# Altium PCB MB1137.PcbDoc (part 2 of 4)
Units mm, origin at the board's own origin, x right, y up, seen from the top; angles counter-clockwise.
Board outline 70.13 x 133.47 mm, 6 copper layers (Top Layer, GND, Signal, PWR, GND (Mid2), Bottom Layer), stack 1.893 mm thick; 293 components, 281 nets, 1134 pads, 921 vias.
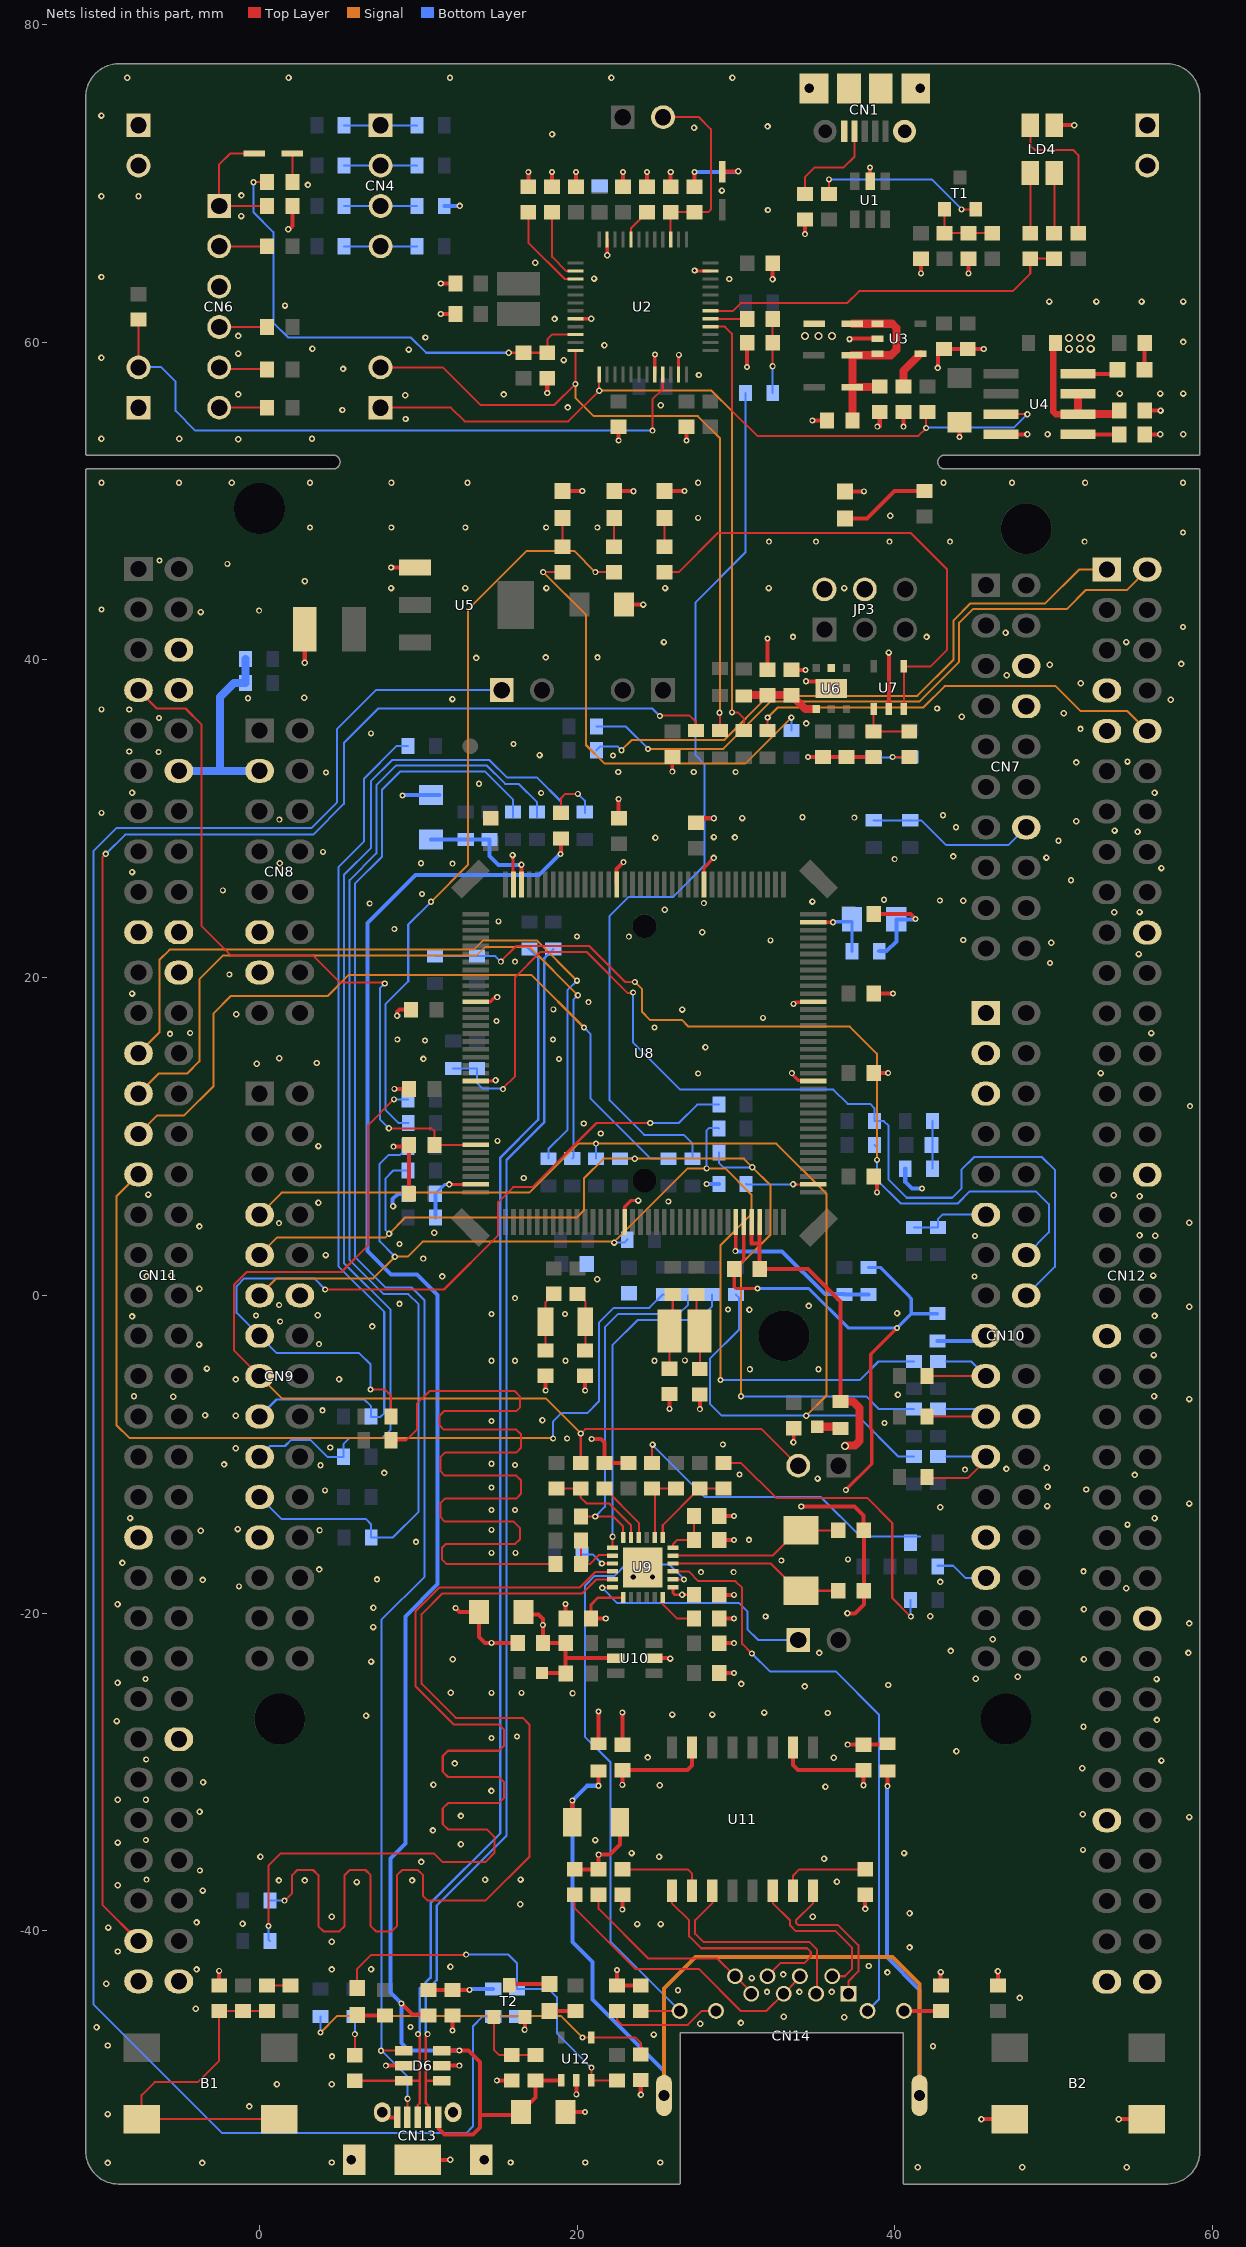
[diagram p6: the nets of this part, all layers, seen from the top]

## Via types
v1: diameter 0.406, hole 0.203, Top Layer to Bottom Layer, tented both sides, 464 vias
v2: diameter 0.381, hole 0.203, Top Layer to Bottom Layer, tented both sides, 415 vias
v3: diameter 0.508, hole 0.305, Top Layer to Bottom Layer, tented both sides, 39 vias
v4: diameter 0.66, hole 0.33, Top Layer to Bottom Layer, tented both sides, 2 vias
v5: diameter 0.381, hole 0.203, Top Layer to Bottom Layer, 1 vias

## Nets (pads, with @x,y where several pads share a name; then routed paths per layer and width w, separated by ;. In a path a pad name is that pad's centre, name@x,y a point inside that pad or via, vN(x,y) a via of type N, cw(c..) or ccw(c..) an arc to the next point about the centre after c; other vN are vias at no path point) (continued)
AGND: C34.2 CN10.3 CN12.32 SB162.2 SB166.1 U8.31 | length 34.6
  Top Layer w0.203: U8.31@30.482,4.615 30.482,2.249 C34.2@29.883,1.651 29.883,0.537 29.986,0.434 31.347,0.434 v2(31.35,0.432) ; v2(36.906,-12.243) 38.537,-10.612 38.537,-8.451 38.473,-8.387 38.473,-3.706 v2(40.132,-2.047)
  Bottom Layer w0.203: v2(31.35,0.432) 34.584,0.432 37.063,-2.047 v2(40.132,-2.047) 41.03,-1.149 ; SB166.1@38.329,1.764 39.079,1.764 40.823,0.02 40.823,0.007 41.03,-0.2 41.03,-1.149 ; SB162.2@42.672,-1.149 41.03,-1.149
AIN_1: R1.2 R24.2 R25.2 U2.10 | length 31
  Top Layer w0.127: v1(-0.381,70.079) R1.2@0.47,70.079 ; v1(15.687,59.339) R25.2@16.612,59.339 R24.2@18.11,59.339 18.11,60.195 18.395,60.48 U2.10@19.88,60.48
  Bottom Layer w0.127: v1(-0.381,70.079) -0.381,68.174 0.864,66.929 0.864,61.239 1.803,60.3 9.525,60.3 10.485,59.339 v1(15.687,59.339)
AVDD: C34.1 CN7.6 CN10.1 CN12.7 SB12.2 U8.32 U8.33 | length 21.6
  Top Layer w0.254: U8.32@30.982,4.615 30.982,3.261 31.482,3.261 ; U8.33@31.482,4.615 31.482,3.261 ; C34.1@31.483,1.575 31.482,1.577 31.482,3.261 ; C34.1@31.483,1.651 34.537,1.651 36.576,-0.388 SB12.2@36.576,-6.675
  Top Layer w0.508: SB12.2@36.576,-6.675 37.358,-6.675 37.77,-7.087 37.77,-9.172 37.493,-9.449 36.881,-9.449 v3(36.852,-9.478)
BOOT0: CN11.7 R36.1 U8.138 | length 46.5
  Top Layer w0.127: CN11.7@-7.62,38.1 -6.464,36.944 -4.661,36.944 -3.658,35.941 -3.658,23.272 -1.773,21.388 3.377,21.388 5.08,19.685 7.874,19.685 v1(7.874,19.634) ; v1(8.142,10.516) 10.82,10.516 11.011,10.325 R36.1@11.011,9.474 ; R36.1@11.023,9.461 U8.138@13.578,9.461
  Bottom Layer w0.127: v1@7.874,19.685 v1(7.874,19.634) 7.569,19.329 7.569,11.089 v1(8.142,10.516)
E5V: CN11.6 D3.1 JP3.2
  other v3: 34.341,60.401 35.192,60.401 36.043,60.401
EGND: C51.1 CN14.13 CN14.14 SB16.1 SB17.1 | length 77.9
  Top Layer w0.254: C51.1@19.684,-33.172 19.684,-31.802 v2(19.685,-31.801) ; v2(21.336,-30.867) SB16.1@21.336,-29.94 ; v2(39.522,-30.893) SB17.1@39.522,-29.94
  Signal w0.254: CN14.14@25.463,-50.359 25.463,-43.625 27.429,-41.659 39.855,-41.659 41.543,-43.346 CN14.13@41.543,-50.359
  Bottom Layer w0.254: v2(21.336,-30.867) 20.618,-30.867 v2(19.685,-31.801) 19.685,-40.691 20.955,-41.961 20.955,-44.326 25.463,-48.833 CN14.14@25.463,-50.359 ; v2(39.522,-30.893) 39.487,-30.928 39.487,-41.658 41.543,-43.713 CN14.13@41.543,-50.359
GND: B2.1 B2.4 C1.1 C2.1 C3.1 C4.1 C5.2 C6.2 C7.2 C8.1 C9.2 C10.1 C11.1 C12.1 C13.1 C14.1 C15.1 C16.2 C17.2 C18.2 C19.1 C20.2 C21.2 C22.1 C23.2 C24.2 C25.2 C26.2 C27.2 C28.2 C29.2 C30.2 C31.2 C32.2 C33.2 C35.2 C36.2 C37.2 C38.2 C39.2 C40.1 C41.2 C42.1 C43.2 C44.1 C45.2 C46.2 C47.1 C48.1 C49.1 C50.1 C53.1 C54.2 C55.2 C56.2 C57.2 C58.2 CN1.5 CN1.6 CN1.7 CN1.8 CN1.9 CN1.10 CN2.1 CN2.2 CN3.1 CN3.2 CN6.3 CN7.8 CN8.11 CN8.13 CN9.12 CN9.23 CN10.5 CN10.17 CN10.22 CN10.27 CN11.8 CN11.19 CN11.20 CN11.22 CN11.49 CN11.60 CN11.71 CN11.72 CN12.9 CN12.20 CN12.39 CN12.54 CN12.63 CN12.71 CN12.72 CN13.5 CN13.6 CN13.7 CN13.8 CN13.9 CN13.10 D6.2 D6.5 JP2.1 LD1.2 LD2.2 LD3.2 LD4.1 LD6.2 R2.2 R3.1 R4.1 R6.1 R7.2 R11.2 R16.1 R24.1 R28.1 R33.2 R36.2 R41.2 R49.2 R58.2 R63.2 R65.2 R66.2 R67.2 R69.1 R72.1 SB16.2 SB17.2 SB106.2 SB107.1 SB129.2 SB152.2 SB153.2 SB155.2 SB162.1 T2.2 U1.2 U2.8 U2.20 U2.23 U2.35 U2.47 U3.2 U4.4 U5.1 U6.0 U6.2 U7.2 U8.16 U8.51 U8.61 U8.83 U8.94 U8.107 U8.120 U8.130 U9.25 U10.2 U12.2 | length 158.5
  Top Layer w0.203: U8.130@13.607,13.49 v1@14.852,13.49 ; U8.120@13.607,18.49 14.53,18.49 14.81,18.771 v2(14.961,18.771) ; v1(15.926,27.719) 15.951,27.694 15.951,25.896 U8.107@15.982,25.865 ; U2.8@19.88,61.48 v1(20.883,61.479) v1(20.883,61.479) ; v1(21.88,65.475) U2.47@21.88,66.48 ; U8.16@22.982,4.615 22.982,5.583 23.368,5.969 v1(23.836,5.969) ; U2.20@24.88,57.98 v2@24.88,59.221 ; v2(25.984,32.969) C21.2@25.984,33.896 C21.2@26.162,33.719 ; U2.23@26.38,57.98 v2@26.38,59.197 ; v1(27.381,64.516) 27.417,64.48 U2.35@28.38,64.48 ; U8.83@27.982,25.865 27.982,26.928 v1(28.594,27.54) ; v2(33.503,13.99) 33.503,13.938 33.905,13.535 34.811,13.535 U8.51@34.857,13.49 ; v1(33.604,-9.246) 33.63,-9.22 C39.2@33.63,-8.354 ; v2(33.618,18.355) 33.716,18.453 U8.61@34.82,18.453
  Top Layer w0.254: R58.2@-2.54,-43.447 v2(-2.54,-42.52) ; v1@1.854,67.107 2.07,67.323 R2.2@2.07,68.58 ; v1(2.844,39.827) C17.2@2.844,41.935 ; CN13.6@7.732,-51.415 8.057,-51.74 CN13.5@8.657,-51.74 ; v2@7.976,-48.489 D6.2@9.062,-48.489 ; v1@8.23,45.822 v1(8.28,45.822) U5.1@9.779,45.822 ; v2(8.426,9.36) R36.2@9.354,9.36 ; v2(8.484,13.005) C30.2@9.411,13.005 ; v1(8.657,17.602) 8.657,17.826 8.814,17.983 C28.2@9.538,17.983 ; C33.2@9.411,6.401 R36.2@9.411,9.474 ; CN13.8@9.957,-54.415 v1(11.997,-54.415) ; v2(11.405,61.773) C6.2@12.332,61.773 ; v2(11.405,63.703) C5.2@12.332,63.703 ; D6.5@11.462,-48.489 v2@12.548,-48.489 ; v2(12.141,-46.279) R63.2@12.141,-45.326 ; v2(12.344,-19.685) 12.598,-19.939 C46.2@13.818,-19.939 13.818,-21.488 14.199,-21.869 v2(14.605,-21.869) C48.1@16.243,-21.869 ; v2(14.935,-49.417) 14.937,-49.416 R69.1@15.875,-49.416 ; v2(16.688,-46.228) 16.703,-46.213 T2.2@16.703,-45.425 ; R3.1@16.916,69.786 v2(16.916,70.714) ; v2(18.009,-5.994) C35.2@18.009,-5.067 ; v2(18.11,56.812) R24.1@18.11,57.739 ; R4.1@18.415,69.786 v2(18.415,70.714) ; LD3.2@19.12,50.634 v2(20.314,50.633) ; C54.2@19.253,-51.41 v2(20.482,-51.41) ; C47.1@19.266,-20.345 v2(19.266,-19.418) ; C1.1@19.914,69.786 v2(19.914,70.714) ; v2(19.939,-50.292) U12.2@19.939,-49.407 ; v2(20.498,-5.994) C36.2@20.498,-5.067 ; v2(20.904,-9.042) 21.488,-9.042 21.717,-9.271 R41.2@21.717,-10.554 C40.1@23.216,-10.554 ; SB16.2@21.336,-28.226 v2(21.336,-26.194) ; LD2.2@22.346,50.622 v2@23.539,50.622 ; U8.94@22.482,25.865 22.482,26.84 v2(22.911,27.269) ; v2(22.504,-42.469) R65.2@22.504,-43.447 R66.2@23.995,-43.447 ; C25.2@22.606,30.099 v2(22.606,31.242) ; v2(22.606,53.823) C12.1@22.606,54.674 ; C49.1@22.835,-28.283 v2(22.835,-26.251) ; C2.1@22.885,69.786 v2(22.885,70.714) ; C18.2@22.936,43.485 v1(24.155,43.485) ; R72.1@23.995,-49.39 23.995,-50.309 v1(24.003,-50.317) ; R6.1@24.384,69.786 v2(24.384,70.714) ; U10.2@24.83,-22.835 25.859,-22.835 25.857,-22.836 v1(25.857,-22.86) ; LD1.2@25.552,50.634 v2@26.746,50.634 ; v2(25.806,-7.137) C37.2@25.806,-6.21 ; R7.2@25.883,69.786 v2(25.883,70.714) ; v2(26.873,53.823) C13.1@26.873,54.674 ; C26.2@27.483,30.035 v2(28.594,30.035) ; v2(27.711,-7.163) C38.2@27.711,-6.236 ; R49.2@28.943,-20.345 v2(29.87,-20.345) ; C44.1@28.943,-18.847 v2(29.87,-18.847) ; C42.1@28.943,-15.392 v2(29.87,-15.392) ; C41.2@28.943,-13.894 v2(29.87,-13.894) ; v2(30.683,58.445) 30.696,58.458 C7.2@30.696,59.969 ; C19.1@31.979,39.383 v2(31.979,41.353) ; v1(32.296,63.97) C3.1@32.296,64.973 ; C20.2@33.477,39.383 v2@34.404,39.383 ; v1(34.105,-13.29) 37.453,-13.29 38.024,-13.861 38.024,-14.77 C43.2@38.036,-14.783 ; v2(34.341,66.802) R11.2@34.341,67.729 ; v2(34.404,38.659) U6.0@35.331,38.659 ; v2(34.531,33.896) C22.1@35.458,33.896 R33.2@38.659,33.896 ; v2(34.798,55.067) C10.1@35.725,55.067 ; LD6.2@36.856,50.617 v2(38.05,50.616) ; v2(37.021,-28.283) C50.1@38.024,-28.283 SB17.2@39.465,-28.283 ; v1@37.073,-20.015 37.468,-20.015 38.036,-19.446 C45.2@38.036,-18.593 C43.2@38.036,-14.783 ; v1@37.135,60.223 U3.2@38.909,60.223 ; C43.2@38.024,-14.795 C43.2@38.036,-14.783 ; U1.2@38.43,70.136 v2(38.43,70.993) ; C31.2@38.671,13.995 v2(39.573,13.995) ; C29.2@38.671,18.999 v2(39.878,18.999) ; C27.2@38.671,24.003 40.989,24.003 v2(41.294,23.698) ; C32.2@38.697,7.518 C32.2@38.671,7.493 38.862,7.302 v2(38.862,6.49) ; v2(38.887,54.686) 39.04,54.686 C14.1@39.04,55.613 ; U7.2@39.611,36.902 v1(39.611,40.462) ; v2(40.538,54.686) C15.1@40.538,55.613 ; v2(41.631,64.338) C4.1@41.631,65.265 ; v1(42.697,58.382) C8.1@42.697,59.385 ; R67.2@42.875,-43.447 v1(42.875,-42.596) ; C8.1@43.078,59.576 C9.2@44.577,59.576 v1(45.58,59.576) ; v2(44.069,54.038) C16.2@44.069,54.966 ; v2(44.62,64.338) R16.1@44.62,65.265 ; v1(45.437,-51.856) B2.1@47.212,-51.856 ; C53.1@46.482,-43.447 v1(46.482,-42.545) ; U4.4@46.673,54.204 v1(48.336,54.204) ; LD4.1@50.026,73.661 v1(51.281,73.661) ; v1(54.087,-51.856) B2.4@55.862,-51.856 ; R28.1@55.715,54.204 v1(56.693,54.204) ; C11.1@55.715,55.702 v1(56.718,55.702)
  Bottom Layer w0.254: v1(8.407,5.613) 8.382,5.613 8.382,6.08 8.699,6.396 SB153.2@9.352,6.396 ; v2(8.992,31.471) 9.017,31.496 C55.2@10.795,31.496 C55.2@11.328,31.496 ; SB106.2@11.627,68.58 v1(12.598,68.58) ; v2(28.143,7.018) 28.151,7.01 SB155.2@28.912,7.01 ; SB129.2@39.008,21.666 39.479,21.666 40.094,22.281 C56.2@40.094,23.52 ; C56.2@40.081,23.673 41.269,23.673 v2(41.294,23.698) ; SB152.2@40.646,7.976 40.646,7.131 41.058,6.719 41.695,6.719 v2(41.707,6.731) ; SB162.1@42.672,-2.864 45.396,-2.864 CN10.17@45.72,-2.54
  other v1: 41.428,-54.889 48.006,-54.889 54.584,-54.889 -9.563,-54.61 -3.613,-54.61 4.547,-54.585 15.799,-54.585 20.503,-54.585 25.222,-54.585 -9.563,-51.537 -0.654,-51.055 1.092,-49.658 4.547,-49.658 4.558,-47.904 42.393,-47.269 -9.563,-47.219 24.816,-46.533 -10.262,-46.076 27.737,-45.847 30.302,-45.796 36.8,-45.441 32.997,-45.415 -4.012,-44.907 47.854,-44.221 31.944,-43.845 33.984,-43.845 36.024,-43.845 26.34,-43.739 -9.652,-43.332 30.982,-42.973 32.964,-42.745 39.522,-42.621 -3.962,-42.431 4.547,-42.431 7.023,-42.418 12.014,-42.266 38.354,-42.215 -8.925,-41.3 40.918,-41.041 4.547,-40.691 -9.525,-39.796 23.774,-39.573 25.248,-39.573 -1.067,-39.548 -3.962,-39.472 4.547,-39.116 34.823,-39.116 40.919,-38.887 16.408,-38.329 -3.581,-37.465 -8.925,-37.135 6.121,-36.932 36.347,-36.906 1.219,-36.83 2.845,-36.83 9.601,-36.83 14.199,-36.779 16.434,-36.772 10.173,-35.662 35.535,-35.458 0.051,-35.331 25.146,-35.331 23.419,-35.103 40.57,-35.103 12.675,-34.544 -8.925,-34.442 21.133,-34.29 10.91,-33.68 58.522,-32.839 12.675,-32.766 51.816,-32.664 -3.778,-32.504 -8.925,-31.75 14.592,-31.191 35.62,-30.937 25.191,-30.836 10.942,-30.8 -3.556,-30.645 51.791,-29.769 12.294,-29.464 56.769,-29.286 36.144,-29.108 24.435,-29.083 43.866,-28.702 51.867,-27.153 -8.992,-26.797 56.49,-26.721 6.706,-26.467 25.982,-26.391 28.499,-26.391 35.763,-26.289 31.775,-26.264 12.04,-25.006 34.315,-24.613 39.573,-24.524 30.328,-24.46 -8.941,-24.384 56.464,-24.155 45.085,-24.132 47.727,-24.003 7.023,-23.048 12.167,-22.911 51.892,-22.911 35.23,-22.504 58.471,-22.504 43.51,-22.377 46.152,-21.641 7.163,-20.879 58.522,-20.65 31.852,-20.214 42.215,-20.202 37.008,-20.015 51.892,-19.761 7.166,-19.66 -8.941,-19.435 54.55,-18.44 42.85,-18.034 -3.581,-17.907 7.391,-17.878 51.868,-17.374 3.762,-17.247 -8.636,-16.84 9.849,-15.519 30.81,-15.392 -3.708,-14.808 -1.372,-14.707 54.635,-14.427 -8.153,-14.021 56.338,-14.034 42.85,-13.335 49.581,-13.259 58.522,-13.105 52.045,-12.217 49.606,-12.04 35.128,-11.532 55.093,-11.303 7.849,-11.176 47.015,-10.922 49.555,-10.846 3.835,-10.693 -2.235,-10.643 -1.499,-9.627 4.445,-9.576 17.805,-7.861 -1.499,-7.569 -3.429,-7.544 3.962,-7.239 58.522,-6.527 -5.436,-6.375 56.312,-6.35 40.183,-6.248 -1.499,-5.288 5.004,-5.283 -3.315,-4.61 56.286,-3.759 -3.81,-3.099 7.099,-1.956 -8.026,-1.321 56.337,-1.295 3.658,-1.245 40.132,-1.118 30.836,-0.908 58.522,-0.711 34.569,-0.66 8.808,-0.533 -3.785,0.414 21.26,1.016 11.506,1.194 -7.112,1.219 -5.563,1.245 56.261,1.251 4.16,2.54 56.389,3.759 55.397,3.785 10.998,3.95 -3.785,4.343 58.522,4.572 3.708,5.837 55.397,6.248 53.772,6.299 -7.01,6.35 16.637,7.391 3.708,9.398 14.859,13.538 52.959,13.995 -0.178,14.58 3.607,14.63 10.312,14.884 1.232,14.935 28.065,15.621 -5.639,16.459 56.134,16.51 -1.473,17.704 26.602,17.995 -8.026,18.999 55.347,21.488 27.864,22.86 53.797,24.116 55.397,24.13 25.502,24.283 34.799,24.791 44.296,24.841 51.079,26.137 -8.026,26.646 56.769,26.899 49.53,27.559 43.663,27.635 50.292,28.626 24.917,28.804 29.921,28.829 28.6,28.854 55.27,29.185 53.823,29.261 43.84,29.464 51.41,29.845 30.378,30.048 -8.026,31.648 56.337,31.648 51.41,33.553 54.635,33.604 17.626,34.011 -8.204,34.239 51.676,35.662 34.417,36.006 44.196,36.424 50.622,36.652 -8.204,36.881 42.647,36.944 57.353,37.49 12.141,37.541 -0.728,37.592 2.819,37.617 51.689,38.538 47.041,39.04 49.74,39.7 58.014,39.751 13.64,40.132 18.009,40.157 21.273,40.157 25.451,41.123 54.559,41.123 33.579,41.453 41.986,41.453 46.965,41.719 -3.708,43.011 8.28,44.526 12.941,44.526 18.055,44.526 25.527,44.526 32.055,44.526 36.805,44.526 2.857,44.958 39.706,49.073 -1.346,53.899 -9.957,53.924 -5.055,53.924 49.606,54.204 58.141,54.204 9.195,55.169 5.213,55.734 19.394,55.898 25.261,56.032 9.169,56.667 -1.346,56.717 15.367,56.717 54.153,56.769 56.693,56.769 58.141,56.769 27.661,57.937 5.258,58.318 19.152,58.877 -9.957,59.028 -1.346,59.284 9.398,59.538 3.327,59.588 21.71,59.817 58.141,60.02 37.135,60.198 10.439,60.3 -1.346,60.4 18.567,61.468 1.6,62.306 49.716,62.56 52.68,62.56 55.524,62.56 58.141,62.56 29.566,63.983 21.057,64.008 -9.957,64.108 17.348,64.999 1.803,67.107 -1.157,67.945 32.004,68.326 -9.957,69.188 -7.62,69.188 -1.145,69.24 29.108,69.545 3.044,69.901 18.415,73.1 27.356,73.508 31.979,73.584 -9.957,74.27 -8.331,76.657 1.829,76.657 11.989,76.657 22.149,76.657 29.769,76.657
  other v2: 7.95,-48.489 12.573,-48.489 9.5,-46.05 -7.112,-36.779 -3.759,-36.195 51.841,-34.9 -7.163,-34.29 -7.163,-31.75 -7.137,-29.21 14.592,-27.864 16.205,-27.767 19.71,-25.044 14.605,-25.019 16.485,-25.019 -7.188,-24.155 -1.295,-18.313 27.788,-17.424 29.845,-17.424 32.842,-16.688 37.033,-16.612 14.605,-16.205 16.104,-16.205 3.785,-14.783 14.605,-14.757 14.605,-13.513 16.078,-13.513 4.115,-12.268 14.605,-12.091 30.206,-11.278 44.399,-10.973 16.078,-10.668 14.605,-10.598 29.159,-9.389 19.365,-9.004 39.345,-8.026 14.605,-7.899 -7.899,-6.35 30.861,-4.648 35.179,-4.648 14.605,-4.115 16.078,-4.115 19.253,-4.115 24.867,-4.115 26.772,-4.089 3.734,-3.073 1.295,-1.651 -0.229,-1.269 14.605,-1.168 19.228,-1.168 29.489,-0.889 1.232,-0.61 16.078,-0.178 45.009,1.194 10.304,2.311 8.814,3.237 45.034,3.734 1.219,4.547 25.73,5.905 14.986,9.728 21.476,10.185 20.408,10.82 58.572,11.913 27.61,13.968 18.847,14.877 10.414,16.053 8.67,16.104 18.466,16.104 -4.369,16.51 24.867,16.866 14.91,17.272 31.699,17.475 18.491,18.009 20.701,18.457 -1.905,20.193 49.76,20.93 16.078,21.006 49.835,22.2 32.163,22.352 44.298,22.377 23.244,22.581 19.99,22.592 8.484,23.063 15.037,23.546 6.93,24.663 27.965,24.689 42.824,24.855 39.306,24.905 10.228,25.273 -2.311,25.502 12.141,27.178 1.27,27.203 10.16,27.203 39.98,27.457 3.988,27.924 1.245,29.947 37.439,30.074 34.171,30.099 43.017,30.226 -9.944,30.378 17.729,31.623 13.818,32.207 4.178,32.918 22.581,32.944 27.33,32.944 29.972,32.944 22.25,33.985 -6.35,34.214 15.977,34.703 7.01,35.382 -6.325,36.347 -9.944,36.893 34.366,39.37 58.128,42.083 -0.025,43.104 -9.944,43.18 2.844,44.971 -2.032,46.05 -6.299,46.253 32.067,47.447 35.027,47.447 39.649,47.447 43.459,47.447 51.943,47.447 58.128,48.031 3.175,48.336 8.293,48.336 12.954,48.336 18.042,48.336 21.26,48.336 27.61,48.946 23.54,50.622 26.746,50.633 -9.944,51.156 -5.067,51.156 -1.753,51.156 3.175,51.156 8.293,51.156 13.086,51.156 27.61,51.156 43.053,51.156 47.361,51.156 51.973,51.156 58.128,51.156 3.302,53.924 26.391,59.207 24.892,59.233
  other v4: 23.53,-17.728 24.73,-17.728
IOREF: CN8.3 CN11.12 SB113.2 SB114.2 | length 13.2
  Bottom Layer w0.508: CN11.12@-5.08,33.02 -2.464,33.02 ; SB113.2@-0.883,40.056 SB114.2@-0.883,38.557 -1.6,38.557 -2.489,37.668 -2.489,33.045 -2.464,33.02 ; CN8.3@0,33.02 -2.464,33.02
LED_STLINK: R13.1 R17.1 U2.30 | length 23.6
  Top Layer w0.127: U2.30@28.38,61.98 28.397,61.963 29.792,61.963 30.288,62.459 36.98,62.459 37.742,63.221 47.409,63.221 48.514,64.326 R13.1@48.514,65.265 R17.1@50.013,65.265
MCO: SB112.2 SB149.1 | length 57.5
  Bottom Layer w0.127: SB149.1@27.247,8.604 27.247,9.578 26.716,10.109 24.206,10.109 22.04,12.275 22.04,23.895 23.216,25.07 26.012,25.07 28.002,27.06 28.002,33.432 27.444,33.99 27.444,43.624 30.588,46.768 SB112.2@30.588,56.794
NetB1_1: B1.1 B1.4 C52.2 R58.1 R59.1 | length 22.1
  Top Layer w0.127: C52.2@0.457,-45.047 R59.1@-1.041,-45.047 R58.1@-2.54,-45.047 -2.54,-48.184 -3.886,-49.53 -6.604,-49.53 -7.424,-50.35 B1.1@-7.424,-51.856 B1.4@1.226,-51.856
NetC7_1: C7.1 R20.2 SB112.1 | length 4.7
  Top Layer w0.127: R20.2@32.296,61.468 C7.1@32.296,59.969 32.296,58.496 v2(32.302,58.489)
  Bottom Layer w0.127: SB112.1@32.302,56.794 v2(32.302,58.489)
NetC10_2: C10.2 C14.2 D3.2 D4.2 D5.2 U3.1 U3.3 | length 13
  Top Layer w0.508: D4.2@37.293,59.182 39.751,59.182 39.842,59.273 40.081,59.512 40.081,60.909 39.827,61.163 D3.2@37.319,61.163 ; D4.2@37.319,59.157 D5.2@37.319,57.175 ; C10.2@37.325,55.067 37.319,55.074 D5.2@37.319,57.175 ; C14.2@39.002,57.175 D5.2@37.319,57.175
NetC11_2: C11.2 JP3.4 SB1.2 U4.6 U4.7 | length 9.9
  Top Layer w0.406: SB1.2@50.108,59.944 49.966,59.802 49.966,55.622 50.114,55.474 U4.6@51.523,55.474
  Top Layer w0.508: U4.7@51.523,56.744 U4.6@51.523,55.474 C11.2@54.115,55.474
  other v3: 50.952,59.588 51.638,59.588 52.324,59.588 50.952,60.274 51.638,60.274 52.324,60.274
NetC15_2: C15.2 U3.4 | length 2.5
  Top Layer w0.508: C15.2@40.538,57.213 40.538,58.203 U3.4@41.609,59.273
NetC19_2: C19.2 C20.1 SB3.1 U6.4 | length 5
  Top Layer w0.508: SB3.1@30.48,37.725 30.537,37.783 C19.2@31.979,37.783 C20.1@33.477,37.783 34.358,36.902 U6.4@35.042,36.902
NetC35_1: C35.1 R37.1 X2.2 | length 3.8
  Top Layer w0.127: C35.1@18.003,-3.462 X2.2@18.003,-1.651 18.003,-0.418 R37.1@18.517,0.095
NetC36_1: C36.1 R38.1 X2.1 | length 3.8
  Top Layer w0.127: R38.1@20.015,0.089 20.503,-0.399 X2.1@20.503,-1.651 C36.1@20.503,-3.462
NetC37_1: C37.1 SB8.1 X3.2 | length 4.7
  Top Layer w0.127: X3.2@25.796,-2.235 26.01,-2.022 SB8.1@26.01,0.057 ; C37.1@25.806,-4.61 X3.2@25.806,-2.245
NetC38_1: C38.1 SB9.1 X3.1 | length 4.8
  Top Layer w0.127: SB9.1@27.508,0.057 27.508,-2.047 X3.1@27.696,-2.235 ; C38.1@27.711,-4.636 X3.1@27.711,-2.25
NetC41_1: C41.1 C42.2 U9.6 | length 3.1
  Top Layer w0.127: U9.6@26.03,-15.878 26.03,-15.651 26.289,-15.392 C42.2@27.343,-15.392 C41.1@27.343,-13.894
NetC43_1: C43.1 U9.5 X4.1 | length 10.8
  Top Layer w0.127: U9.5@26.03,-16.378 32.289,-16.378 33.879,-14.788 X4.1@34.087,-14.788 36.203,-14.788 C43.1@36.208,-14.783
NetC44_2: C44.2 C46.1 C47.2 C48.2 C49.2 C50.2 L2.1 R50.2 R51.2 R52.2 R53.2 U9.1 U9.19 U10.5 U11.2 U11.7 | length 31.3
  Top Layer w0.178: C47.2@20.866,-20.345 20.866,-19.469 21.308,-19.028 U9.19@22.88,-19.028 ; U9.1@26.03,-18.378 26.03,-18.74 26.137,-18.847 v1(26.594,-18.847) C44.2@27.343,-18.847
  Top Layer w0.254: C46.1@16.612,-20.091 17.551,-20.091 17.843,-20.383 C48.2@17.843,-21.869 R52.2@19.266,-21.869 19.266,-22.809 ; L2.1@17.767,-23.774 R53.2@19.241,-23.774 ; R53.2@19.266,-23.8 19.266,-22.809 ; C47.2@20.866,-20.345 v2(21.793,-20.345) ; U10.5@22.43,-22.835 19.291,-22.835 19.266,-22.809 ; v2(22.835,-30.81) C49.2@22.835,-29.883 ; C49.2@23.165,-29.883 26.949,-29.883 27.229,-29.603 U11.7@27.229,-28.459 ; R51.2@28.943,-23.774 v2(29.87,-23.774) ; R50.2@28.943,-21.895 v2(29.87,-21.895) ; U11.2@33.579,-28.459 33.579,-29.566 33.896,-29.883 C50.2@38.024,-29.883 v2(38.024,-30.836)
  other v2: 17.831,-20.752
NetC45_1: C45.1 U9.4 X4.2 | length 11.5
  Top Layer w0.127: U9.4@26.03,-16.878 32.187,-16.878 33.897,-18.588 X4.2@34.087,-18.588 ; X4.2@33.65,-18.588 33.858,-18.588 33.863,-18.593 C45.1@36.361,-18.593
NetC51_2: C51.2 R54.1 R55.1 R56.1 R57.1 | length 7.2
  Top Layer w0.254: R54.1@19.837,-36.132 R55.1@21.344,-36.132 v2(21.344,-35.204) 22.049,-35.204 22.684,-34.57 C51.2@22.684,-33.172 ; v2(22.835,-38.659) R56.1@22.835,-37.732 ; v1(38.125,-38.621) R57.1@38.125,-37.732
NetC52_1: C52.1 R60.2 | length 1.5
  Top Layer w0.127: C52.1@0.457,-43.447 R60.2@1.956,-43.447
NetC54_1: C54.1 CN13.1 D6.6 R35.1 R62.1 R68.1 U12.1 | length 112.8
  Top Layer w0.254: v2(8.922,-44.577) 9.624,-45.28 10.596,-45.28 R62.1@10.643,-45.326 ; CN13.1@11.257,-51.74 11.257,-52.43 11.643,-52.817 13.437,-52.817 13.868,-52.385 13.868,-51.587 ; D6.6@11.462,-47.539 v2(12.573,-47.539) 13.147,-47.539 13.868,-48.26 13.868,-51.587 ; v2(18.952,27.788) 18.974,27.809 R35.1@18.974,28.766 ; U12.1@18.989,-49.407 18.98,-49.416 R68.1@17.374,-49.416 17.374,-50.495 C54.1@16.459,-51.41 16.281,-51.587 13.868,-51.587
  Bottom Layer w0.254: v2(12.573,-47.539) 9.394,-47.539 8.922,-47.066 v2(8.922,-44.577) 8.232,-43.887 8.232,-35.456 9.182,-34.506 9.182,-20.2 11.214,-18.168 11.214,0.019 9.908,1.325 8.267,1.325 6.792,2.8 6.792,23.454 9.804,26.467 17.577,26.467 18.898,27.788 v2(18.952,27.788)
NetC55_1: C55.1 SB123.1 SB124.1 U8.106 | length 8.2
  Top Layer w0.254: U8.106@16.482,25.865 v1(16.482,27.105)
  Bottom Layer w0.254: C55.1@10.795,28.702 12.973,28.702 SB123.1@12.979,28.708 SB124.1@14.478,28.708 14.478,27.661 15.034,27.105 v1(16.482,27.105)
NetC56_1: C56.1 SB129.1 U8.71 | length 4.3
  Top Layer w0.203: U8.71@34.857,23.49 v2(36.091,23.49)
  Bottom Layer w0.203: v2(36.091,23.49) 36.121,23.52 37.3,23.52 37.3,21.673 SB129.1@37.294,21.666
NetCN1_4: CN1.4 R11.1 | length 6.3
  Top Layer w0.127: R11.1@34.341,69.329 34.341,70.407 34.926,70.993 36.754,70.993 37.45,71.689 CN1.4@37.45,73.279
NetCN4_1: CN4.1 SB101.2 SB102.1 | length 4.6
  Bottom Layer w0.127: SB101.2@5.328,73.66 CN4.1@7.62,73.66 SB102.1@9.912,73.66
NetCN4_2: CN4.2 SB103.2 SB104.1 | length 4.6
  Bottom Layer w0.127: SB103.2@5.328,71.12 SB104.1@9.912,71.12
NetCN4_3: CN4.3 SB105.2 SB106.1 | length 4.6
  Bottom Layer w0.127: SB105.2@5.328,68.58 CN4.3@7.62,68.58 SB106.1@9.912,68.58
NetCN4_4: CN4.4 SB108.2 SB109.1 | length 4.6
  Bottom Layer w0.127: SB108.2@5.328,66.04 CN4.4@7.62,66.04 SB109.1@9.912,66.04
NetCN5_1: CN5.1 SB5.1 U2.13 | length 45.5
  Top Layer w0.127: CN5.1@7.612,55.88 12.04,55.88 12.903,55.016 19.443,55.016 v1(21.38,56.954) U2.13@21.38,57.98 ; v2(29.743,36.703) 30.099,36.703 30.48,36.322 SB5.1@30.48,35.56
  Signal w0.127: v1(21.38,56.954) 28.448,56.954 29.743,55.658 v2(29.743,36.703)
NetCN5_2: CN5.2 SB6.1 U2.12 | length 45.3
  Top Layer w0.127: CN5.2@7.612,58.42 11.532,58.42 13.894,56.058 18.567,56.058 v2(19.875,57.366) 19.88,57.37 U2.12@19.88,59.48 ; SB6.1@28.981,35.56 v2@28.981,36.676
  Signal w0.127: v2(19.875,57.366) 19.875,56.502 21.031,55.347 27.584,55.347 28.983,53.948 v2@28.983,36.678
  other v2: 28.956,36.678
NetCN6_1: CN6.1 D1.1 R2.1 | length 8.1
  Top Layer w0.127: D1.1@-0.311,71.881 -1.854,71.881 -2.54,71.195 CN6.1@-2.54,68.58 R2.1@0.47,68.58
NetCN6_2: CN6.2 R10.1 | length 3
  Top Layer w0.127: CN6.2@-2.54,66.04 R10.1@0.432,66.04
NetCN6_4: CN6.4 R19.1 | length 3
  Top Layer w0.127: CN6.4@-2.54,60.96 0.381,60.96 R19.1@0.406,60.985
NetCN6_5: CN6.5 R22.1 | length 3
  Top Layer w0.127: CN6.5@-2.54,58.42 -2.426,58.304 R22.1@0.421,58.304
NetCN6_6: CN6.6 R23.1 | length 3
  Top Layer w0.127: CN6.6@-2.54,55.88 0.507,55.879 R23.1@0.508,55.88
NetCN7_14: CN7.14 SB121.1 SB122.1 | length 10.7
  Bottom Layer w0.127: SB121.1@38.659,29.909 SB122.1@40.964,29.909 ; SB122.1@40.974,29.919 SB122.1@40.964,29.909 ; CN7.14@48.26,29.464 47.155,28.359 43.198,28.359 41.649,29.909 SB122.1@40.964,29.909
NetCN9_7: CN9.7 SB146.1 SB165.1 SB174.1 | length 76.3
  Signal w0.127: CN9.7@0,5.08 1.384,6.464 16.98,6.464 20.066,9.55 v2(21.184,9.55) 32.537,9.55 35.687,6.401 35.687,-6.299 v1(34.417,-7.569)
  Bottom Layer w0.127: SB146.1@21.184,8.604 21.184,9.523 21.211,9.55 v2(21.184,9.55) ; SB165.1@29.986,0.052 30.188,-0.15 30.188,-2.147 28.346,-3.988 28.346,-6.821 29.095,-7.569 v1(34.417,-7.569) 37.643,-7.569 40.221,-10.147 SB174.1@41.199,-10.147
NetCN9_9: CN9.9 SB143.1 SB147.1 SB150.1 SB171.1 | length 70.8
  Signal w0.127: CN9.9@0,2.54 1.091,3.631 7.899,3.631 v1(8.153,3.886) 9.169,4.902 19.964,4.902 20.422,5.359 20.422,7.366 21.66,8.604 v1(23.616,8.604) 30.48,8.604 v1(31.02,8.064) 32.163,6.921 32.163,3.826 30.302,1.965 v2(30.302,-6.35)
  Bottom Layer w0.127: v1(8.153,3.886) 7.915,4.125 7.915,7.356 8.42,7.861 SB143.1@9.354,7.861 ; SB147.1@22.682,8.604 v1(23.616,8.604) ; SB150.1@28.912,8.992 28.912,8.344 29.191,8.064 v1(31.02,8.064) ; v2(30.302,-6.35) 38.181,-6.35 38.981,-7.15 SB171.1@41.199,-7.15
NetCN9_11: CN9.11 SB138.1 SB140.1 SB157.1 SB167.1 | length 72.7
  Signal w0.127: CN9.11@0,0 1.068,1.068 7.157,1.068 v1(8.523,2.434) 9.317,2.434 10.262,3.378 22.327,3.378 26.949,8.001 v2(28.143,8.001) 29.312,8.001 30.963,6.35 30.963,5.096 29.009,3.143 v2(29.009,-5.329)
  Bottom Layer w0.127: v1(8.523,2.434) 7.562,3.395 7.562,8.279 8.134,8.852 8.846,8.852 SB138.1@9.354,9.36 ; v1(22.327,3.327) 22.968,3.327 SB157.1@23.146,3.505 ; v2(28.143,8.001) 28.143,10.389 28.296,10.541 28.886,10.541 SB140.1@28.912,10.516 ; v2(29.009,-5.329) 37.794,-5.329 38.964,-4.159 SB167.1@41.192,-4.159
NetCN9_13: CN9.13 SB11.1 SB137.1 | length 52.7
  Top Layer w0.127: v2(4.132,0.373) 11.609,0.373 15.014,3.778 15.014,5.87 15.964,6.82 17.178,6.82 21.211,10.853 v1(24.587,10.853) ; v2(6.985,-5.918) 7.874,-5.918 8.274,-6.318 SB11.1@8.274,-7.619
  Bottom Layer w0.127: v2(4.132,0.373) 3.438,1.068 -0.964,1.068 -1.448,0.584 -1.448,-1.092 CN9.13@0,-2.54 1.091,-3.631 6.273,-3.631 6.985,-4.343 v2(6.985,-5.918) ; v1(24.587,10.853) 26.391,10.853 27.552,12.014 SB137.1@28.912,12.014
NetCN9_15: CN9.15 JP6.2 R40.2 SB136.1 | length 65
  Top Layer w0.127: CN9.15@0,-5.08 -1.6,-3.48 -1.6,0.686 -0.814,1.472 5.155,1.472 6.836,3.153 6.836,10.721 v2(8.458,12.343) ; R40.2@20.219,-10.554 v2(20.219,-8.687) 20.491,-8.415 31.605,-8.415 JP6.2@33.909,-10.719
  Signal w0.127: CN9.15@0,-5.08 1.422,-6.502 18.034,-6.502 v2(20.219,-8.687)
  Bottom Layer w0.127: v2(8.458,12.343) v2(8.458,12.343) SB136.1@9.354,12.344
NetCN9_17: CN9.17 SB115.1 SB169.1 | length 54.7
  Bottom Layer w0.127: CN9.17@0,-7.62 1.068,-6.552 2.982,-6.552 ; 2.983,-6.553 6.6,-6.553 7.004,-6.957 SB169.1@7.004,-7.62 7.029,-7.645 7.612,-7.645 7.849,-7.409 7.849,-1.041 4.963,1.845 4.963,26.96 6.579,28.575 6.579,32.537 8.636,34.595 SB115.1@9.354,34.595
NetCN9_19: CN9.19 SB128.1 SB170.1 | length 67.7
  Bottom Layer w0.127: CN9.19@0,-10.16 0.68,-9.48 1.6,-9.48 1.987,-9.092 3.2,-9.092 4.268,-10.16 SB170.1@5.29,-10.16 5.29,-9.341 5.669,-8.962 7.739,-8.962 8.255,-8.445 8.255,-0.908 5.316,2.031 5.316,26.474 7.003,28.161 7.003,32.364 8.342,33.703 14.463,33.703 15.578,32.588 17.475,32.588 18.974,31.09 SB128.1@18.974,30.423 SB128.1@18.974,30.099
NetCN9_21: CN9.21 SB126.1 SB176.1 | length 73.9
  Bottom Layer w0.127: CN9.21@0,-12.7 1.372,-14.072 6.68,-14.072 7.029,-14.421 SB176.1@7.029,-15.24 8.382,-15.24 10.008,-13.614 10.008,-0.559 9.373,0.076 7.809,0.076 5.669,2.216 5.669,26.142 7.356,27.828 7.356,32.121 8.585,33.35 14.317,33.35 15.46,32.207 16.3,32.207 17.475,31.032 SB126.1@17.475,30.423 SB126.1@17.475,30.099
NetCN10_11: CN10.11 SB158.2 SB159.2 | length 5.2
  Bottom Layer w0.127: SB158.2@41.199,4.286 SB159.2@42.697,4.286 42.697,4.801 42.977,5.08 CN10.11@45.72,5.08
NetCN10_14: CN10.14 SB130.2 SB131.2 SB151.2 | length 56.9
  Top Layer w0.127: v2(15.189,21.006) 15.189,21.023 16.162,21.996 20.745,21.996 23.006,19.736 v2(23.622,19.736)
  Signal w0.127: v2(23.622,19.736) 24.079,19.279 24.079,17.838 24.571,17.346 25.03,17.346 ; 25.032,17.348 25.03,17.346 ; v2(38.862,8.534) 38.862,15.215 37.16,16.916 27,16.916 26.571,17.346 25.03,17.346
  Bottom Layer w0.127: SB130.2@11.049,21.355 SB131.2@13.691,21.355 14.84,21.355 v2(15.189,21.006) ; SB151.2@38.703,9.474 38.862,9.315 v2(38.862,8.534) 38.862,7.289 40.365,5.786 43.937,5.786 44.704,6.552 48.87,6.552 49.682,5.74 49.682,3.962 CN10.14@48.26,2.54
NetCN10_16: CN10.16 SB134.2 SB135.2 SB141.2 | length 67.7
  Top Layer w0.127: v2(15.316,12.979) 15.316,13.03 16.091,13.805 16.091,20.028 17.678,21.615 20.587,21.615 23.178,19.025 23.495,19.025 23.52,19.05 v2(23.52,19.075)
  Bottom Layer w0.127: SB134.2@12.192,14.287 SB135.2@13.691,14.287 13.691,13.36 14.04,13.011 15.285,13.011 v2(15.316,12.979) ; v2(23.52,19.075) 23.52,15.912 26.479,12.954 36.121,12.954 37.02,12.055 38.434,12.055 38.703,11.786 SB141.2@38.703,10.973 39.294,10.973 39.598,10.669 39.598,7.282 40.733,6.147 43.599,6.147 44.171,6.719 44.171,7.899 44.983,8.711 49.251,8.711 50.063,7.899 50.063,1.803 CN10.16@48.26,0
NetCN10_19: CN10.19 SB10.2 SB168.2 | length 6.6
  Top Layer w0.127: SB10.2@42.005,-5.08 CN10.19@45.72,-5.08
  Bottom Layer w0.127: 43.205,-4.159 44.799,-4.159 CN10.19@45.72,-5.08
NetCN10_21: CN10.21 SB14.2 SB172.2 | length 6.4
  Top Layer w0.127: SB14.2@42.005,-7.62 CN10.21@45.72,-7.62
  Bottom Layer w0.127: 43.205,-7.15 45.25,-7.15 CN10.21@45.72,-7.62
NetCN10_23: CN10.23 SB15.2 SB175.2 | length 6.9
  Top Layer w0.127: SB15.2@42.005,-11.43 42.056,-11.481 44.61,-11.481 45.72,-10.37 CN10.23@45.72,-10.16
  Bottom Layer w0.127: 43.205,-10.141 45.701,-10.141 CN10.23@45.72,-10.16
NetCN10_29: CN10.29 SB179.2 | length 3.3
  Bottom Layer w0.127: SB179.2@42.691,-17.018 43.663,-17.018 44.425,-17.78 CN10.29@45.72,-17.78
NetCN11_25: CN11.25 SB144.2 | length 46.2
  Signal w0.127: CN11.25@-7.62,15.24 -6.299,16.561 -6.299,21.134 -5.664,21.769 -4.48,21.769 ; -4.479,21.768 -0.601,21.768 ; -0.6,21.769 0.6,21.769 ; 0.601,21.768 1.939,21.768 ; 1.94,21.769 3.14,21.769 ; 3.141,21.768 13.493,21.768 14.052,22.327 17.475,22.327 v1(19.982,19.82)
  Bottom Layer w0.127: SB144.2@18.186,8.604 18.186,9.224 19.393,10.43 19.393,19.231 v1(19.982,19.82)
NetCN11_27: CN11.27 SB145.2 | length 46.2
  Signal w0.127: CN11.27@-7.62,12.7 -6.35,13.97 -4.547,13.97 -3.785,14.732 -3.785,19.914 -2.311,21.387 -0.443,21.387 ; -0.442,21.388 0.442,21.388 ; 0.443,21.387 2.097,21.387 ; 2.098,21.388 2.982,21.388 ; 2.983,21.387 13.651,21.387 14.209,21.946 16.993,21.946 v1(20.041,18.898)
  Bottom Layer w0.127: SB145.2@19.685,8.611 19.774,8.699 19.774,18.631 v1(20.041,18.898)
NetCN11_29: CN11.29 SB148.2 | length 47.4
  Signal w0.127: CN11.29@-7.62,10.16 -6.452,11.328 -4.75,11.328 -2.896,13.183 -2.896,17.755 -1.803,18.848 2.982,18.848 ; 2.983,18.847 4.293,18.847 5.618,20.173 17.115,20.173 v2(20.422,16.866)
  Bottom Layer w0.127: v2(20.422,16.866) 20.828,16.459 20.828,12.408 24.632,8.604 SB148.2@25.748,8.604
NetCN11_31: CN11.31 SB163.2 | length 58.5
  Signal w0.127: CN11.31@-7.62,7.62 -9.013,6.227 -9.013,-8.158 -8.179,-8.992 18.469,-8.992 v2(18.482,-9.004)
  Bottom Layer w0.127: v2(18.482,-9.004) 18.482,-7.934 19.025,-7.391 20.65,-7.391 21.361,-6.68 21.361,-1.727 22.301,-0.787 24.536,-0.787 25.381,0.057 SB163.2@25.476,0.057
NetCN11_69: CN11.69 SB4.2 | length 113.5
  Top Layer w0.127: v1(-9.677,27.788) -9.899,27.566 -9.899,-38.361 CN11.69@-7.62,-40.64 ; v2@25.222,36.5 27.076,36.5 27.483,36.093 SB4.2@27.483,35.56
  Bottom Layer w0.127: v1(-9.677,27.788) -8.457,29.008 3.379,29.008 5.309,30.937 5.309,34.773 7.48,36.944 24.727,36.944 v2(25.197,36.474)
NetCN12_1: CN12.1 SB117.2 | length 38.8
  Signal w0.127: v2(22.776,34.315) 23.411,34.95 29.235,34.95 32.029,37.744 41.402,37.744 43.688,40.03 43.688,42.494 44.755,43.561 49.454,43.561 51.587,45.695 CN12.1@53.34,45.695 CN12.1@53.137,45.898
  Bottom Layer w0.127: SB117.2@21.203,34.315 21.43,34.543 22.549,34.543 v2(22.776,34.315) ; CN12.1@53.314,45.721 CN12.1@53.34,45.695
NetCN12_2: CN12.2 SB116.2 | length 41.4
  Signal w0.127: v2(24.46,34.398) 29.191,34.398 32.184,37.391 34.69,37.391 41.548,37.391 43.508,39.351 44.041,39.884 44.041,39.901 44.044,39.903 44.044,42.35 44.899,43.205 50.8,43.205 51.994,44.399 54.585,44.399 CN12.2@55.88,45.695
  Bottom Layer w0.127: SB116.2@21.209,35.814 23.044,35.814 v2(24.46,34.398)
NetCN12_10: CN12.10 SB7.1 | length 26.7
  Top Layer w0.127: SB7.1@31.979,35.56 v1(31.979,36.379)
  Signal w0.127: v1(31.979,36.379) 32.607,37.008 41.783,37.008 43.129,38.354 50.114,38.354 51.689,36.779 54.635,36.779 CN12.10@55.88,35.535
NetCN13_2: CN13.2 D6.4 SB133.1 | length 78
  Top Layer w0.155: v2(10.585,-46.507) 10.472,-46.62 10.472,-49.454 ; CN13.2@10.607,-51.74 10.607,-50.982 10.472,-50.847 10.472,-49.454 ; D6.4@11.462,-49.439 10.488,-49.439 10.472,-49.454
  Bottom Layer w0.155: v2(10.585,-46.507) 10.472,-46.394 10.472,-43.782 11.151,-43.104 11.151,-38.41 15.545,-34.016 15.545,8.524 17.927,10.906 17.927,21.229 SB133.1@18.491,21.793
NetCN13_3: CN13.3 D6.3 R70.1 SB132.1 | length 81.2
  Top Layer w0.155: R70.1@5.994,-49.441 5.997,-49.439 D6.3@9.062,-49.439 10.081,-49.439 10.091,-49.428 ; CN13.3@9.957,-51.74 9.957,-50.982 10.091,-50.847 10.091,-49.428 ; v2(9.978,-46.507) 10.091,-46.62 10.091,-49.428
  Bottom Layer w0.155: v2(9.978,-46.507) 10.091,-46.394 10.091,-43.624 10.77,-42.946 10.77,-38.252 15.164,-33.858 15.164,8.681 17.546,11.063 17.546,21.229 SB132.1@16.982,21.793 SB132.1@16.893,21.882
NetCN13_4: CN13.4 D6.1 SB125.1 | length 100.9
  Top Layer w0.127: v2(7.645,-47.549) 7.656,-47.539 D6.1@9.062,-47.539 ; CN13.4@9.307,-51.74 9.307,-50.586 v2(9.322,-50.571)
  Bottom Layer w0.127: v2(7.645,-47.549) 7.689,-47.549 9.322,-49.181 v2(9.322,-50.571) ; v2@7.663,-47.531 7.663,-20.43 10.389,-17.704 10.389,-0.323 9.566,0.5 7.925,0.5 6.022,2.402 6.022,25.936 7.709,27.622 7.709,31.839 8.839,32.969 14.199,32.969 15.962,31.206 SB125.1@15.962,30.423 SB125.1@15.962,30.099
NetCN14_1: CN14.1 U11.16 | length 10.3
  Top Layer w0.13: U11.16@34.849,-37.479 34.849,-38.256 33.769,-39.336 33.769,-39.494 33.912,-39.637 36.422,-39.637 37.694,-40.909 37.694,-42.547 37.073,-43.168 CN14.1@37.073,-43.959
NetCN14_2: CN14.2 U11.14 | length 9.9
  Top Layer w0.13: U11.14@32.309,-37.479 32.309,-38.256 33.388,-39.336 33.388,-39.651 33.755,-40.018 36.264,-40.018 37.287,-41.041 37.287,-42.415 36.843,-42.859 CN14.2@36.053,-42.859
NetCN14_3: CN14.3 U11.11 | length 14
  Top Layer w0.13: U11.11@28.499,-37.479 28.499,-38.256 27.419,-39.336 27.419,-40.183 27.953,-40.716 33.208,-40.716 33.587,-40.716 34.626,-40.716 35.077,-41.168 35.077,-43.914 CN14.3@35.033,-43.959
NetCN14_4: CN14.4 CN14.5 R54.2 | length 18.7
  Top Layer w0.127: R54.2@19.837,-37.732 19.837,-38.583 23.647,-42.393 27.635,-42.393 30.29,-45.047 31.905,-45.047 CN14.5@32.993,-43.959 34.013,-42.939 CN14.4@34.013,-42.859
NetCN14_6: CN14.6 U11.9 | length 14.9
  Top Layer w0.13: U11.9@25.959,-37.479 25.959,-38.256 27.038,-39.336 27.038,-40.341 27.795,-41.097 27.953,-41.097 28.773,-41.097 34.468,-41.097 34.696,-41.326 34.696,-41.631 34.314,-42.013 32.818,-42.013 CN14.6@31.973,-42.859
NetCN14_7: CN14.7 CN14.8 R55.2 | length 12.8
  Top Layer w0.127: R55.2@21.344,-37.732 21.344,-38.616 24.47,-41.742 28.815,-41.742 CN14.8@29.933,-42.859 30.953,-43.879 CN14.7@30.953,-43.959
NetCN14_9: CN14.9 R67.1 | length 2.3
  Top Layer w0.254: CN14.9@40.563,-45.039 40.57,-45.047 R67.1@42.901,-45.047
NetCN14_10: CN14.10 U9.3 | length 37.7
  Top Layer w0.127: U9.3@26.03,-17.378 27.004,-17.378 27.61,-17.983 29.947,-17.983 30.378,-18.415 30.378,-21.934 v2(30.988,-22.543)
  Bottom Layer w0.127: v2(30.988,-22.543) 32.118,-23.673 36.279,-23.673 38.989,-26.383 38.989,-44.323 CN14.10@38.273,-45.039
NetCN14_11: CN14.11 R65.1 | length 7.3
  Top Layer w0.127: R65.1@22.504,-45.047 22.504,-45.644 22.784,-45.923 26.964,-45.923 27.848,-45.039 CN14.11@28.733,-45.039
NetCN14_12: CN14.12 R66.1 U9.2 | length 41.8
  Top Layer w0.127: R66.1@23.995,-45.047 24.003,-45.039 CN14.12@26.443,-45.039 26.435,-45.047 R66.1@24.206,-45.047 ; U9.2@26.03,-17.878 v2(26.721,-17.878)
  Bottom Layer w0.127: CN14.12@26.443,-45.039 22.098,-40.694 22.098,-29.403 20.498,-27.802 20.498,-18.263 21.107,-17.653 22.352,-17.653 23.063,-16.942 25.785,-16.942 v2(26.721,-17.878)
NetD1_2: D1.2 R1.1 | length 1.8
  Top Layer w0.127: D1.2@2.064,71.882 2.07,71.876 R1.1@2.07,70.079
NetD2_2: D2.2 R8.1 | length 4.8
  Top Layer w0.254: R8.1@27.381,69.786 v2(27.381,70.714) ; D2.2@29.134,70.745 v1@30.115,70.745
  Bottom Layer w0.127: v1@30.084,70.814 v1(30.134,70.764)
  Bottom Layer w0.254: v2(27.381,70.714) 30.083,70.714 v1(30.134,70.764)
NetJP1_2: JP1.2 R7.1 R8.2 U2.39 | length 12.7
  Top Layer w0.127: JP1.2@25.4,74.168 27.661,74.168 28.409,73.42 28.409,68.351 28.244,68.186 R8.2@27.381,68.186 ; U2.39@25.88,66.479 U2.39@25.88,66.48 R7.1@25.88,68.182 ; R7.1@25.883,68.185 R8.2@27.381,68.185
NetJP2_2: JP2.2 R18.2 U2.21 | length 41.8
  Top Layer w0.127: JP2.2@-7.62,58.42 JP2.2@-7.62,58.42 R18.2@-7.62,61.327 ; v2(24.73,54.432) 24.73,56.404 25.38,57.054 U2.21@25.38,57.98
  Bottom Layer w0.127: JP2.2@-7.645,58.445 -6.223,58.445 -5.283,57.506 -5.283,55.677 -4.039,54.432 v2(24.73,54.432)
NetJP4_1: JP4.1 SB184.1 SB185.2 | length 142
  Bottom Layer w0.127: JP4.1@15.24,38.1 7.315,38.1 4.877,35.662 4.877,31.039 3.25,29.412 -9.018,29.412 -10.462,27.968 -10.462,-44.63 -2.362,-52.73 13.005,-52.73 13.437,-52.299 13.437,-45.999 14.054,-45.382 SB184.1@14.707,-45.382 14.708,-45.383 SB185.2@16.205,-45.383
NetJP7_1: JP7.1 U9.18 | length 14.4
  Top Layer w0.127: v1(21.565,-18.415) 21.565,-18.378 U9.18@22.23,-18.378
  Bottom Layer w0.127: v1(21.565,-18.415) 22.517,-19.367 30.188,-19.367 30.709,-19.888 30.709,-21.018 31.382,-21.692 JP7.1@33.273,-21.692
NetL1_2: L1.2 SB12.1 | length 1.5
  Top Layer w0.508: L1.2@35.103,-8.268 36.454,-8.268 SB12.1@36.576,-8.39
NetLD1_1: LD1.1 R32.2 | length 1.8
  Top Layer w0.127: R32.2@25.502,47.13 LD1.1@25.502,48.934
NetLD2_1: LD2.1 R31.2 | length 1.8
  Top Layer w0.127: LD2.1@22.295,48.922 22.301,48.916 R31.2@22.301,47.13
NetLD3_1: LD3.1 R30.2 | length 1.8
  Top Layer w0.127: R30.2@19.069,47.129 LD3.1@19.069,48.934
NetLD4_2: LD4.2 R17.2 | length 3.8
  Top Layer w0.127: R17.2@50.013,66.865 50.026,66.879 LD4.2@50.026,70.661
NetLD4_3: LD4.3 R13.2 | length 3.8
  Top Layer w0.127: R13.2@48.514,66.865 48.526,66.877 LD4.3@48.526,70.661
NetLD4_4: LD4.4 R14.1 | length 9.5
  Top Layer w0.127: LD4.4@48.526,73.661 48.526,72.378 48.793,72.111 51.206,72.111 51.537,71.78 R14.1@51.537,66.865
NetLD5_1: LD5.1 R21.2 | length 1.7
  Top Layer w0.254: LD5.1@55.715,58.268 R21.2@55.715,59.944
NetLD5_2: LD5.2 U4.8 | length 2.5
  Top Layer w0.254: U4.8@51.523,58.014 LD5.2@54.014,58.014
NetLD6_1: LD6.1 R29.1 | length 5.7
  Top Layer w0.254: LD6.1@36.856,48.917 38.249,48.917 39.967,50.635 R29.1@41.859,50.635
NetLD7_1: LD7.1 R61.1 | length 1.8
  Top Layer w0.254: LD7.1@6.147,-45.3 6.173,-45.326 R61.1@7.899,-45.326
NetLD7_2: LD7.2 R71.2 SB185.1 U12.3 | length 23.8
  Top Layer w0.127: LD7.2@6.147,-43.371 6.147,-42.393 7.022,-41.517 12.991,-41.517 v2(13.005,-41.504) ; v2(20.889,-48.616) U12.3@20.889,-49.407 20.879,-49.417 22.503,-49.417 R71.2@22.504,-49.416
  Bottom Layer w0.127: v2(13.005,-41.504) 15.672,-41.504 16.205,-42.037 SB185.1@16.205,-43.669 18.218,-43.669 18.72,-44.171 18.72,-46.446 v2(20.889,-48.616)
NetLD8_1: LD8.1 R64.1 | length 1.6
  Top Layer w0.254: LD8.1@18.263,-45.046 R64.1@19.888,-45.046
NetLD8_2: LD8.2 T2.3 | length 2.6
  Top Layer w0.254: T2.3@15.723,-43.425 15.801,-43.346 LD8.2@18.263,-43.346
NetR3_2: R3.2 U2.3 | length 5.8
  Top Layer w0.127: R3.2@16.916,68.186 16.916,66.267 19.204,63.98 U2.3@19.88,63.98
NetR4_2: R4.2 U2.2 | length 4.7
  Top Layer w0.127: R4.2@18.415,68.193 R4.2@18.415,68.186 18.415,65.38 19.316,64.479 U2.2@19.88,64.48
NetR6_2: R6.2 U2.44 | length 2.1
  Top Layer w0.127: U2.44@23.38,66.479 23.38,67.173 R6.2@24.392,68.185
NetR9_2: R9.2 T1.2 | length 10.9
  Top Layer w0.127: R9.2@35.839,69.329 v2@35.839,70.18 ; v2(44.194,68.367) T1.2@45.074,68.367
  Bottom Layer w0.127: v2(35.839,70.256) 42.305,70.256 v2(44.194,68.367)
NetR12_1: R12.1 R15.1 R16.2 T1.1 | length 4.5
  Top Layer w0.127: T1.1@43.122,68.36 R15.1@43.122,66.865 R12.1@46.119,66.865
NetR20_1: R20.1 U2.29 | length 2.3
  Top Layer w0.127: U2.29@28.38,61.48 R20.1@30.685,61.479
NetR27_2: R27.2 U2.28 U4.3 | length 28.7
  Top Layer w0.127: U2.28@28.38,60.98 29.289,60.98 29.731,60.538 29.731,55.701 31.331,54.102 41.466,54.102 v2(41.961,54.597) R27.2@41.961,55.524 ; U4.3@46.673,55.474 v1(48.336,55.474)
  Bottom Layer w0.127: v2@42.037,54.625 47.488,54.625 v1(48.336,55.474)
NetR28_2: R28.2 U4.5 | length 2.4
  Top Layer w0.254: U4.5@51.523,54.204 R28.2@53.881,54.204
NetR30_1: R30.1 SB118.2 | length 28.6
  Top Layer w0.127: v2(17.855,45.529) R30.1@19.069,45.529
  Signal w0.127: v2(17.855,45.529) 20.549,42.835 20.549,34.646 21.717,33.477 30.582,33.477 v1(33.477,36.373)
  Bottom Layer w0.127: SB118.2@33.477,35.56 v1(33.477,36.373)
NetR31_1: R31.1 SB139.2 | length 47
  Top Layer w0.127: v2@21.134,45.53 R31.1@22.301,45.53 R31.1@22.568,45.53
  Signal w0.127: v2(10.795,24.781) 13.106,27.092 13.106,43.155 16.815,46.863 19.799,46.863 v2(21.133,45.529)
  Bottom Layer w0.127: SB139.2@9.36,10.846 8.757,10.846 7.925,11.678 7.925,18.339 9.36,19.774 9.36,23.346 v2(10.795,24.781)
NetR32_1: R32.1 U7.3 U7.4 | length 30.6
  Top Layer w0.127: R32.1@25.552,45.53 26.378,45.53 28.842,47.993 40.983,47.993 43.282,45.695 43.282,40.64 42.244,39.602 U7.4@40.561,39.602 U7.3@40.561,36.902
NetR33_1: R33.1 R34.1 U7.1 | length 3.6
  Top Layer w0.127: U7.1@38.661,36.902 38.661,35.499 R33.1@38.659,35.496 R34.1@40.894,35.496
NetR34_2: R34.2 SB119.1 SB120.2 | length 3.4
  Top Layer w0.127: v2(39.853,33.896) R34.2@40.894,33.896
  Bottom Layer w0.127: SB119.1@38.659,33.845 40.919,33.845 SB120.2@40.964,33.89
NetR35_2: R35.2 SB127.1 | length 3.5
  Top Layer w0.127: R35.2@18.974,30.035 R35.2@18.98,30.042 ; R35.2@18.974,30.366 18.974,31.293 19.253,31.572 v2(20.032,31.572)
  Bottom Layer w0.127: v2(20.032,31.572) 20.041,31.572 20.472,31.14 SB127.1@20.472,30.423 SB127.1@20.472,30.366
NetR39_2: R39.2 R40.1 U9.11 | length 7
  Top Layer w0.127: R39.2@18.694,-12.154 R40.1@20.219,-12.154 ; R40.1@20.219,-11.925 R40.1@20.219,-12.154 ; U9.11@23.38,-15.228 23.38,-14.465 22.017,-13.102 20.595,-13.102 20.219,-12.726 R40.1@20.219,-12.154
NetR41_1: R41.1 U9.10 | length 4.2
  Top Layer w0.127: R41.1@21.717,-11.925 R41.1@21.717,-12.154 23.88,-14.317 U9.10@23.88,-15.228
NetR42_1: R42.1 R43.2 U9.8 | length 4.6
  Top Layer w0.127: R42.1@24.714,-12.154 R42.1@24.88,-12.154 ; U9.8@24.88,-15.228 R42.1@24.88,-12.154 ; R43.2@26.213,-12.154 R42.1@24.88,-12.154
NetR42_2: R42.2 SB178.1 | length 20.4
  Top Layer w0.127: R42.2@24.714,-10.554 v1@24.714,-9.398
  Bottom Layer w0.127: v1@24.714,-9.398 28.016,-12.7 35.343,-12.7 37.807,-15.164 41.561,-15.164
  other v1: 24.74,-9.389
NetR44_2: R44.2 R45.1 U9.7 | length 5.6
  Top Layer w0.127: U9.7@25.38,-15.228 25.38,-14.458 27.684,-12.154 R44.2@27.711,-12.154 R45.1@29.21,-12.154
NetR45_2: R45.2 SB181.1 | length 19.6
  Top Layer w0.127: R45.2@29.21,-10.554 30.315,-10.554 32.512,-12.751 38.252,-12.751 39.827,-14.326 39.827,-19.05 v2(40.996,-20.218)
  Bottom Layer w0.127: v2@40.977,-20.199 SB181.1@40.977,-19.177
NetR46_1: R46.1 SB160.1 U9.12 | length 22.2
  Top Layer w0.127: R46.1@20.231,-13.919 v1(21.133,-13.919) 22.276,-13.919 22.88,-14.523 U9.12@22.88,-15.228
  Bottom Layer w0.127: v1(21.133,-13.919) 21.742,-13.31 21.742,-2.007 22.581,-1.168 26.383,-1.168 26.975,-0.577 SB160.1@26.975,0.006
NetR47_2: R47.2 R48.1 U9.14 | length 3.7
  Top Layer w0.127: R47.2@20.231,-15.418 R48.1@20.231,-16.916 20.777,-16.916 21.337,-16.357 22.209,-16.357 U9.14@22.23,-16.378
NetR48_2: R48.2 SB13.1 | length 61
  Top Layer w0.127: SB13.1@8.274,-9.119 9.233,-9.119 9.906,-8.445 9.906,-6.833 10.719,-6.02 16.053,-6.02 16.408,-6.375 16.408,-7.036 16.154,-7.29 11.608,-7.29 11.328,-7.569 11.328,-8.179 11.595,-8.445 16.17,-8.445 16.459,-8.735 16.459,-9.604 16.17,-9.893 11.669,-9.893 11.379,-10.183 11.379,-11.052 11.669,-11.341 16.17,-11.341 16.459,-11.631 16.459,-12.499 16.17,-12.789 11.669,-12.789 11.379,-13.078 11.379,-13.947 11.669,-14.237 15.989,-14.237 16.383,-14.63 16.383,-15.367 16.104,-15.646 11.737,-15.646 11.481,-15.903 11.481,-16.612 11.786,-16.916 R48.2@18.631,-16.916
NetR49_1: R49.1 U9.24 | length 2.7
  Top Layer w0.127: U9.24@25.38,-19.028 25.38,-19.436 26.289,-20.345 R49.1@27.343,-20.345
NetR56_2: R56.2 U11.10 | length 5.6
  Top Layer w0.127: R56.2@22.835,-36.132 26.962,-36.132 27.229,-36.398 U11.10@27.229,-37.479
NetR57_2: R57.2 U11.15 | length 5.7
  Top Layer w0.127: U11.15@33.579,-37.479 33.579,-36.525 33.972,-36.132 R57.2@38.125,-36.132
NetR62_2: R62.2 R63.1 SB184.2 | length 4.1
  Top Layer w0.254: R62.2@10.643,-43.726 R63.1@12.141,-43.726 13.195,-43.726 v2(13.208,-43.713)
  Bottom Layer w0.254: v2(13.208,-43.713) 13.254,-43.667 SB184.2@14.707,-43.667
NetR68_2: R68.2 R69.2 T2.1 | length 4.8
  Top Layer w0.127: T2.1@14.743,-45.425 14.743,-47.483 15.088,-47.828 15.1,-47.816 R69.2@15.875,-47.816 R68.2@17.374,-47.816
NetR70_2: R70.2 SB186.2 | length 2.5
  Top Layer w0.127: R70.2@5.994,-47.841 v2(5.994,-46.507)
  Bottom Layer w0.127: v2(5.994,-46.507) SB186.2@5.994,-45.382
NetR72_2: R72.2 SB187.2 U12.4 | length 23
  Top Layer w0.127: v2(20.32,-46.711) 20.324,-46.707 U12.4@20.889,-46.707 23.645,-46.707 23.995,-47.056 R72.2@23.995,-47.79
  Signal w0.127: v2(3.835,-46.406) 4.865,-45.376 18.986,-45.376 v2(20.32,-46.711)
  Bottom Layer w0.127: v2(3.835,-46.406) SB187.2@3.835,-45.382
NetR73_2: R73.2 SB142.1 SB152.1 | length 3
  Bottom Layer w0.127: SB152.1@42.361,7.976 SB142.1@42.361,10.973
NetSB153_1: SB153.1 SB154.1 U8.143 | length 4.3
  Top Layer w0.178: v1(11.938,6.985) U8.143@13.602,6.985
  Bottom Layer w0.178: SB153.1@11.067,6.396 11.655,6.985 v1(11.938,6.985)
  Bottom Layer w0.254: SB154.1@11.067,4.898 SB153.1@11.067,6.396
NetSB155_1: SB155.1 U8.38 | length 4.3
  Top Layer w0.127: v1@33.553,7.018 v1(33.581,6.99) U8.38@34.857,6.99
  Bottom Layer w0.127: SB155.1@30.626,7.01 30.662,6.975 33.566,6.975 v1(33.581,6.99)
NetSB161_2: SB161.2 SB166.2 U8.30 | length 11.4
  Top Layer w0.203: v2(29.951,2.781) 29.982,2.812 U8.30@29.982,4.615
  Bottom Layer w0.254: v2(29.951,2.781) 29.961,2.771 32.888,2.771 35.582,0.077 36.802,0.077 SB161.2@36.83,0.05 SB166.2@38.329,0.05
NetSB164_1: SB164.1 U9.13 | length 20.8
  Top Layer w0.127: U9.13@22.23,-15.878 v2(22.23,-15.194)
  Bottom Layer w0.127: v2(22.23,-15.194) 22.23,-3.119 23.8,-1.549 27.614,-1.549 28.487,-0.676 SB164.1@28.487,0.052
NetSB177_2: SB177.2 U9.15 | length 2.2
  Top Layer w0.127: v1(21.553,-16.878) U9.15@22.23,-16.878
  Bottom Layer w0.127: SB177.2@20.288,-16.307 20.982,-16.307 v1(21.553,-16.878)
NetSB182_2: SB182.2 U9.17 | length 67.9
  Top Layer w0.127: v2(1.575,-38.1) 2.045,-37.63 2.045,-36.5 2.375,-36.17 3.365,-36.17 3.696,-36.5 3.696,-39.7 4.026,-40.03 5.016,-40.03 5.347,-39.7 5.347,-36.5 5.677,-36.17 6.667,-36.17 6.998,-36.5 6.998,-39.7 7.328,-40.03 8.319,-40.03 8.649,-39.7 8.649,-36.5 8.979,-36.17 9.97,-36.17 10.3,-36.5 10.3,-37.821 10.579,-38.1 14.217,-38.1 16.993,-35.324 16.993,-27.026 16.561,-26.594 12.344,-26.594 10.198,-24.447 10.198,-20.071 11.502,-18.767 20.319,-18.767 21.208,-17.878 U9.17@22.23,-17.878
  Bottom Layer w0.127: SB182.2@0.654,-38.1 v2(1.575,-38.1)
NetSB183_2: SB183.2 U9.16 | length 65.6
  Top Layer w0.127: v2(0.559,-39.7) 0.559,-35.89 1.321,-35.128 10.973,-35.128 11.502,-35.658 14.228,-35.658 14.783,-35.103 14.783,-34.087 14.313,-33.617 11.862,-33.617 11.532,-33.287 11.532,-32.296 11.862,-31.966 15.062,-31.966 15.392,-31.636 15.392,-30.645 15.062,-30.315 11.862,-30.315 11.532,-29.985 11.532,-28.994 11.862,-28.664 15.062,-28.664 15.392,-28.334 15.392,-27.343 15.062,-27.013 12.225,-27.013 9.817,-24.605 9.817,-19.875 11.307,-18.386 20.161,-18.386 21.148,-17.398 22.209,-17.398 U9.16@22.23,-17.378
  Bottom Layer w0.127: v2(0.559,-39.7) 0.559,-40.545 SB183.2@0.654,-40.64